# Altium PCB ETRX_RECU.PcbDoc
Units mm, origin at the board's own origin, x right, y up, seen from the top; angles counter-clockwise.
Board outline 155 x 55 mm, 4 copper layers (Top Layer, GND, PWR, Bottom Layer), stack 1.506 mm thick; 75 components, 59 nets, 293 pads, 278 vias.
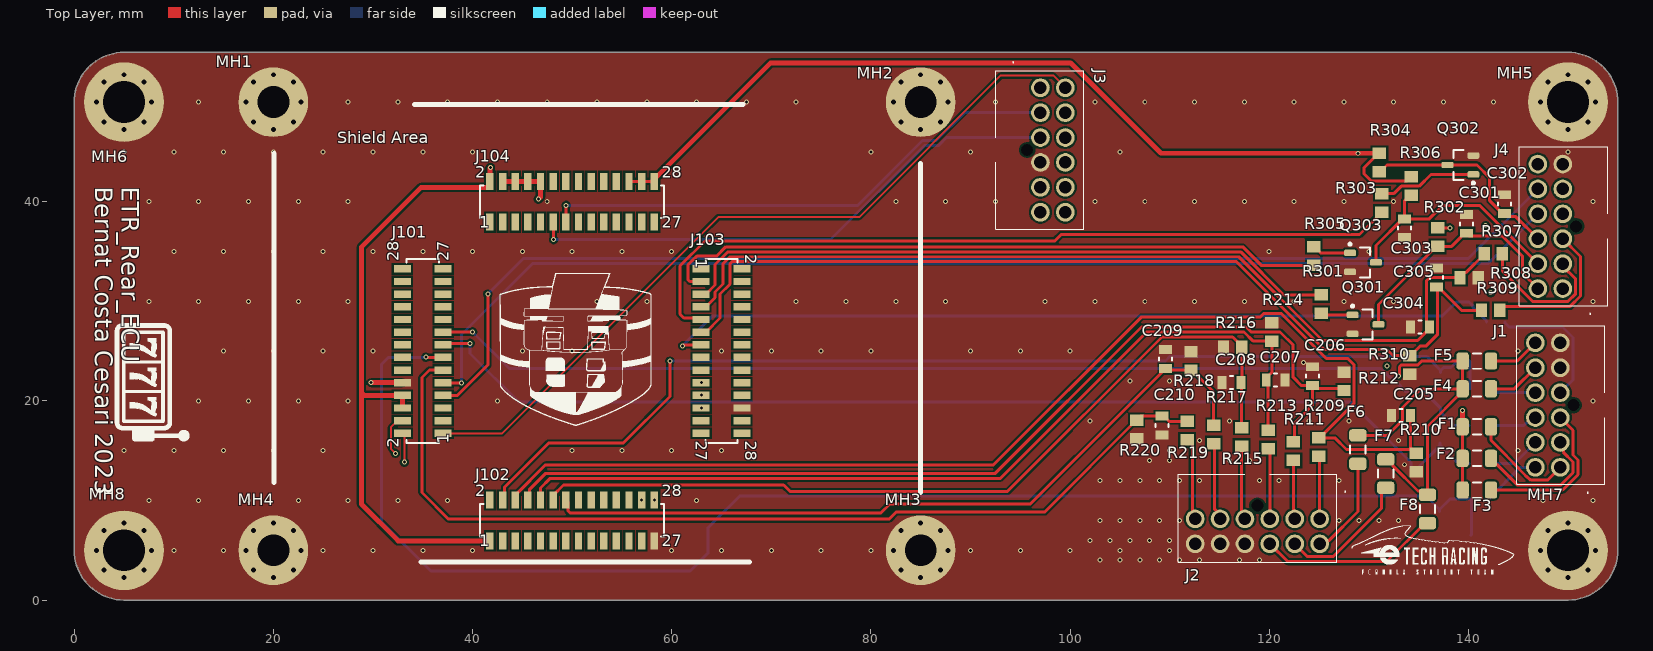
[diagram p0: Top Layer view]
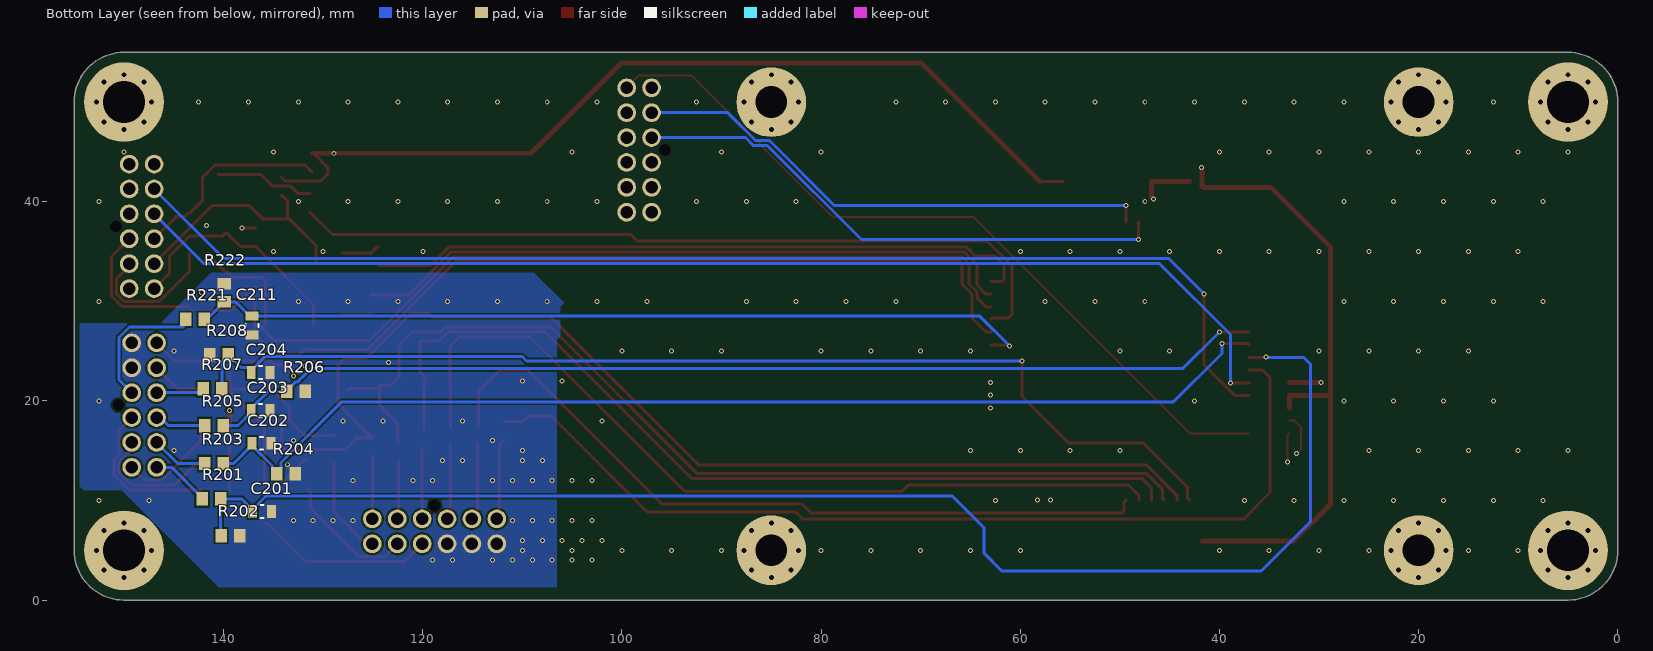
[diagram p1: Bottom Layer view, seen from below]
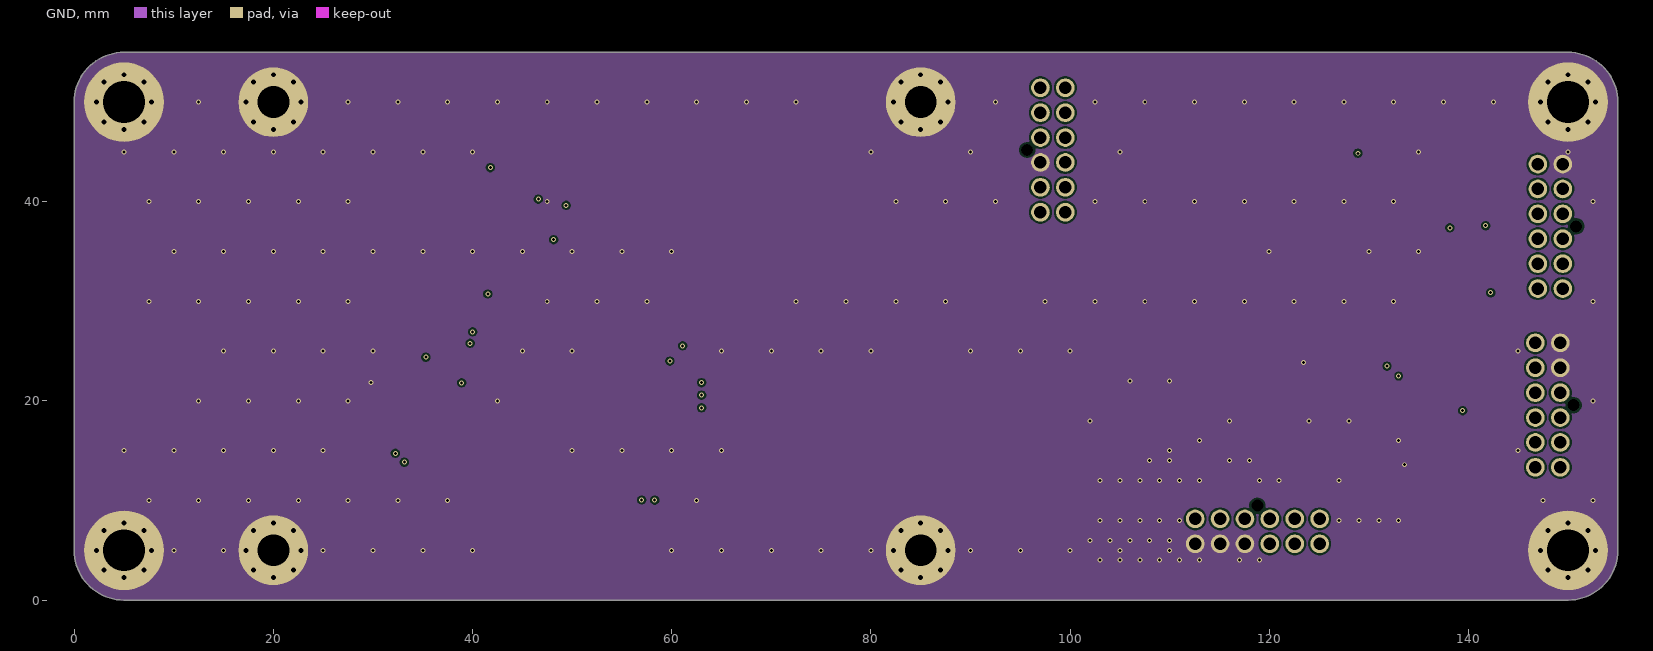
[diagram p2: GND]
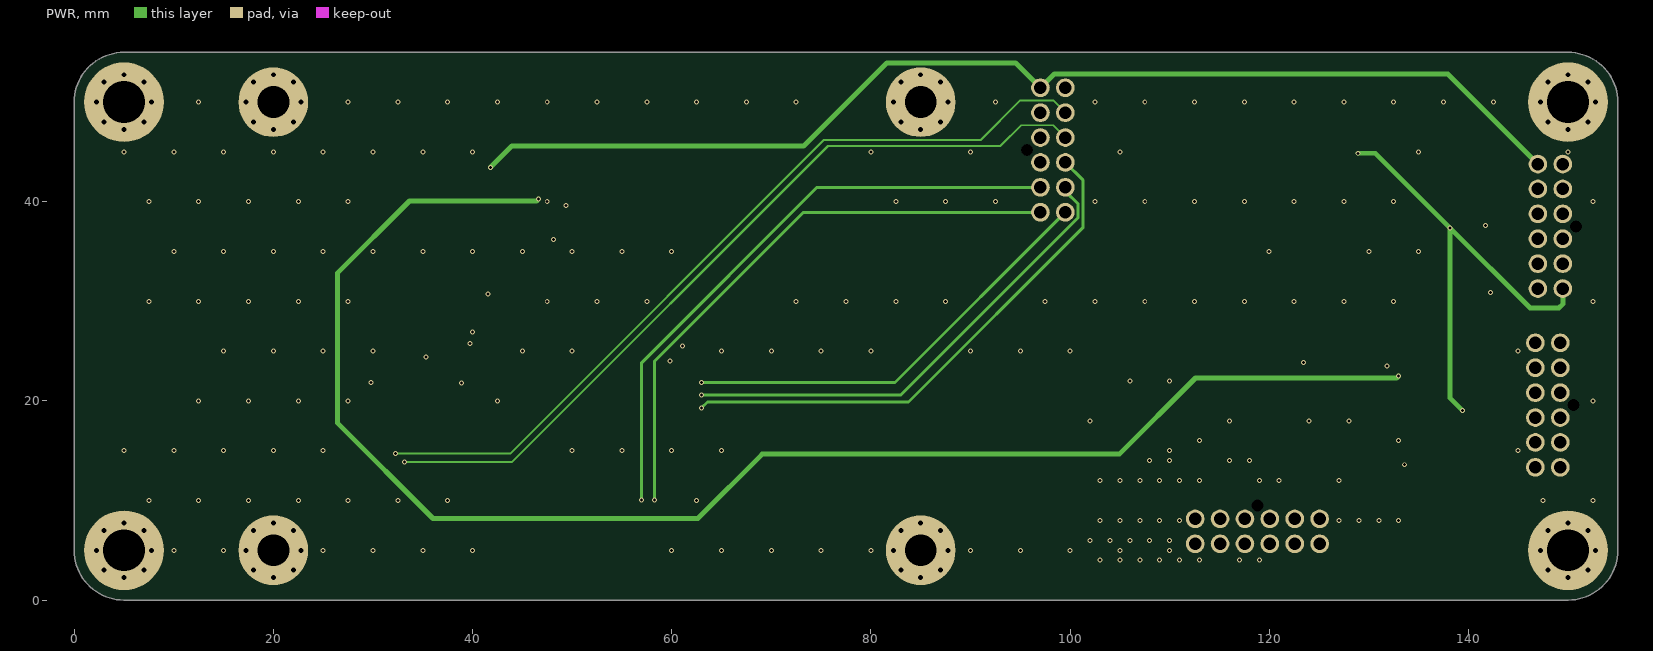
[diagram p3: PWR]
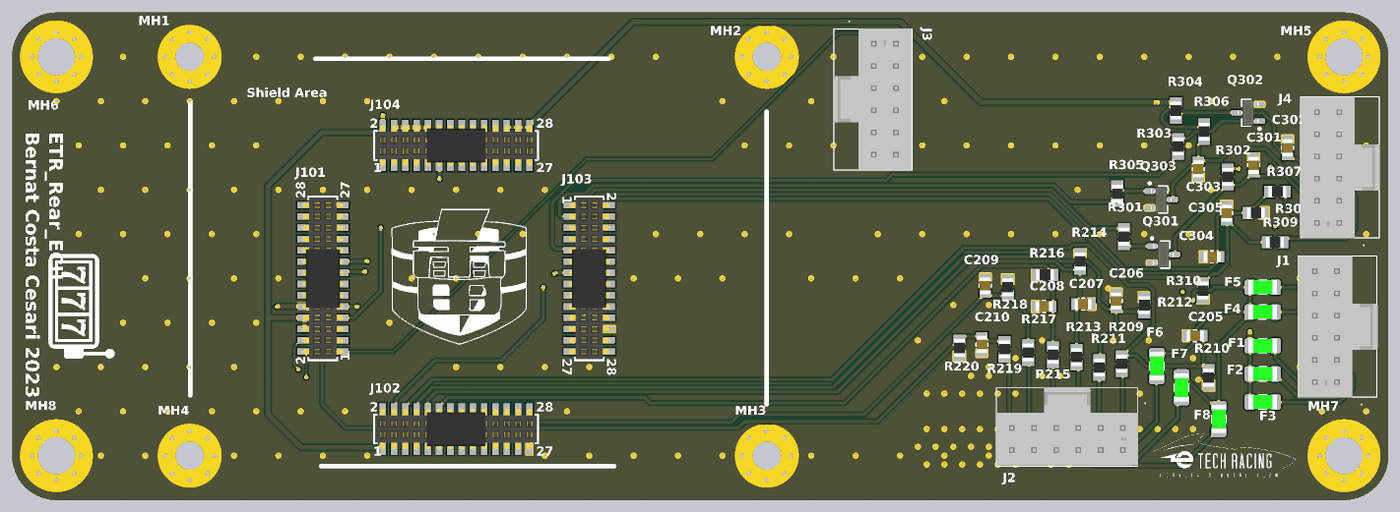
[diagram p4: 3D render of the assembled board from above, using the file's embedded part models]
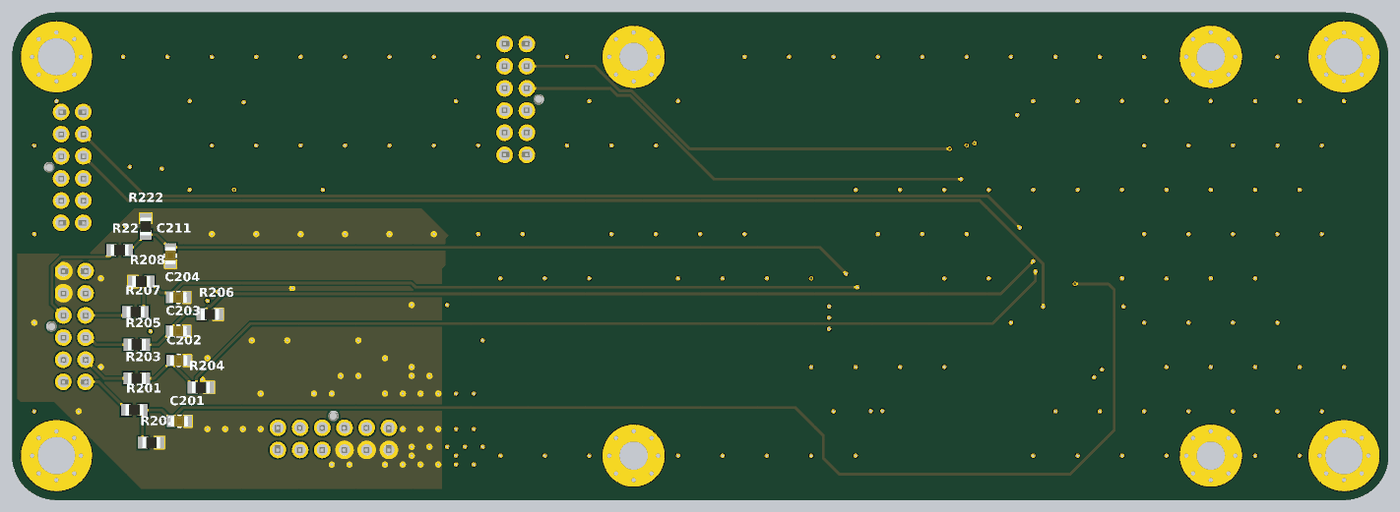
[diagram p5: 3D render of the assembled board from below, using the file's embedded part models]

## Layer stack, top to bottom
Top Solder: solder mask 0.01, Solder Resist, Dk 3.5
Top Layer: signal copper 0.035
Dielectric 2: prepreg 0.1, PP-006, Dk 4.1
GND: signal copper 0.018
Dielectric 4: prepreg 0.1, PP-006, Dk 4.1
Dielectric 1: dielectric 1, FR-4, Dk 4.8
Dielectric 5: prepreg 0.1, PP-006, Dk 4.1
PWR: signal copper 0.018
Dielectric 3: prepreg 0.1, PP-006, Dk 4.1
Bottom Layer: signal copper 0.035
Bottom Solder: solder mask 0.01, Solder Resist, Dk 3.5

## Board outline
5,0 cw(c5,5) 0,5 0,50 cw(c5,50) 5,55 150,55 cw(c150,50) 155,50 155,5 cw(c150,5) 150,0

## Design rules (kind name [scope] priority, off if disabled: settings)
Clearance [All] p1: gap=0.2 ignorepadtopadclearanceinfootprint=FALSE
HoleSize [All] p1: absolutevalues=TRUE maxlimit=2.54 minlimit=0.3 maxpercent=80.000 minpercent=20.000
PlaneClearance [All] p1: clearance=0.5
PlaneConnect [All] p1: planeconnectstyle=Direct reliefexpansion=0.508 reliefentries=4 reliefconductorwidth=0.254 reliefairgap=0.254
PolygonConnect [All] p1: connectstyle=Direct reliefconductorwidth=0.254 reliefentries=4 polygonreliefangle="90 Angle" airgapwidth=0.254
RoutingVias [All] p1: holewidth=0.3 width=0.5 viastyle="Through Hole" minholewidth=0.2 minwidth=0.3 maxholewidth=0.5 maxwidth=0.7
SolderMaskExpansion [All] p1: expansion=0.102 istentingtop=FALSE
Width [All] p1: maxlimit=1 minlimit=0.2 preferedwidth=0.3 minimp=50.000000 maximp=50.000000 favimp=50.000000
27 further rules are at their usual default settings.

## Classes and differential pairs
component class ETRX_RECU: F1 F2 F3 F4 F5 F6 F7 F8 J1 J2 J3 J4 MH1 MH2 MH3 MH4 MH5 MH6 MH7 MH8
component class [3]Power: C301 C302 C303 C304 C305 Q301 Q302 Q303 R301 R302 R303 R304 R305 R306 R307 R308 R309 R310
component class [2]Sensors: C201 C202 C203 C204 C205 C206 C207 C208 C209 C210 C211 R201 R202 R203 R204 R205 R206 R207 R208 R209 R210 R211 R212 R213 R214 R215 R216 R217 R218 R219 R220 R221 R222
component class [1]Shield: J101 J102 J103 J104

## Components (designator, comment, footprint, x,y, rotation, side; value= is the part's Value field where it differs from the comment)
C201 "885012207103" C0805FNPC-R 136.144,8.89 r180 bottom
C202 "885012207103" C0805FNPC-R 136.21,15.748 r180 bottom
C203 "885012207103" C0805FNPC-R 136.271,19.05 r180 bottom
C204 "885012207103" C0805FNPC-R 136.271,22.86 r180 bottom
C205 "885012207098" C0805FNPC-R 133.223,18.542 r180 top
C206 "885012207098" C0805FNPC-R 124.333,22.479 r90 top
C207 "885012207098" C0805FNPC-R 120.65,22.098 r0 top
C208 "885012207098" C0805FNPC-R 116.205,21.844 r180 top
C209 "885012207098" C0805FNPC-R 109.601,24.196 r90 top
C210 "885012207098" C0805FNPC-R 109.22,17.526 r270 top
C211 "885012207103" C0805FNPC-R 137.16,27.559 r270 bottom
C301 "885012207103" C0805FNPC-R 139.827,37.785 r90 top
C302 "885012207103" C0805FNPC-R 143.637,39.751 r90 top
C303 "885012207103" C0805FNPC-R 133.604,37.338 r270 top
C304 "885012207103" C0805FNPC-R 135.128,27.432 r180 top
C305 "885012207103" C0805FNPC-R 136.779,32.385 r90 top
F1 "0437001.WRA" Fuse_1206 140.843,17.399 r0 top
F2 "0437001.WRA" Fuse_1206 140.843,14.224 r0 top
F3 "0437001.WRA" Fuse_1206 140.843,11.049 r0 top
F4 "0437001.WRA" Fuse_1206 140.843,21.209 r180 top
F5 "0437001.WRA" Fuse_1206 140.843,24.003 r180 top
F6 "0437001.WRA" Fuse_1206 128.905,15.113 r90 top
F7 "0437001.WRA" Fuse_1206 131.699,12.7 r90 top
F8 "0437001.WRA" Fuse_1206 135.89,9.144 r90 top
J1 "1053101112" J_NanoFit_2x6_V 149.225,13.328 r270 top
J2 "1053101112" J_NanoFit_2x6_V 125.062,8.15 r0 top
J3 "1053101112" J_NanoFit_2x6_V 97.028,51.442 r90 top
J4 "1053101112" J_NanoFit_2x6_V 149.479,31.282 r270 top
J101 "62332821021" 62332821021 35,25 r90 top
J102 "62332821021" 62332821021 50,8 r0 top
J103 "62332821021" 62332821021 65,25 r270 top
J104 "62332821021" 62332821021 50,40 r0 top
MH1 "Mounting_Hole_M3" Mounting_Hole_M3 20,50 r0 top
MH2 "Mounting_Hole_M3" Mounting_Hole_M3 85,50 r0 top
MH3 "Mounting_Hole_M3" Mounting_Hole_M3 85,5 r0 top
MH4 "Mounting_Hole_M3" Mounting_Hole_M3 20,5 r0 top
MH5 "Mounting_Hole_M4" Mounting_Hole_M4 150,50 r0 top
MH6 "Mounting_Hole_M4" Mounting_Hole_M4 5,50 r0 top
MH7 "Mounting_Hole_M4" Mounting_Hole_M4 150,5 r0 top
MH8 "Mounting_Hole_M4" Mounting_Hole_M4 5,5 r0 top
Q301 "BC817-25LT1G" TRT-NPN-0.5/45-SOT23 129.667,27.686 r0 top
Q302 "BC817-25LT1G" TRT-NPN-0.5/45-SOT23 139.192,43.688 r180 top
Q303 "BC817-25LT1G" TRT-NPN-0.5/45-SOT23 129.413,33.909 r0 top
R201 "CR0805-JW-102ELF" R0805FTK 141.224,10.16 r0 bottom
R202 "1k96" R0805FTK 139.319,6.477 r0 bottom
R203 "CR0805-JW-102ELF" R0805FTK 140.97,13.716 r0 bottom
R204 "1k96" R0805FTK 133.731,12.7 r0 bottom
R205 "CR0805-JW-102ELF" R0805FTK 140.97,17.526 r0 bottom
R206 "1k96" R0805FTK 132.715,20.955 r0 bottom
R207 "CR0805-JW-102ELF" R0805FTK 141.097,21.209 r0 bottom
R208 "1k96" R0805FTK 140.462,24.638 r180 bottom
R209 "12k5" R0805FTK 124.968,15.367 r90 top
R210 "2k" R0805FTK 134.747,13.807 r270 top
R211 "12k5" R0805FTK 122.428,14.95 r90 top
R212 "2k" R0805FTK 127.508,21.971 r90 top
R213 "12k5" R0805FTK 119.888,16.129 r90 top
R214 "2k" R0805FTK 120.269,26.924 r90 top
R215 "12k5" R0805FTK 117.221,16.383 r90 top
R216 "2k" R0805FTK 116.332,25.4 r180 top
R217 "12k5" R0805FTK 114.427,16.637 r90 top
R218 "2k" R0805FTK 112.141,24.003 r90 top
R219 "12k5" R0805FTK 111.76,17.018 r90 top
R220 "2k" R0805FTK 106.68,17.145 r270 top
R221 "CR0805-JW-102ELF" R0805FTK 142.875,28.194 r0 bottom
R222 "1k96" R0805FTK 139.954,30.861 r270 bottom
R301 "CR0805-JW-102ELF" R0805FTK 125.222,29.718 r270 top
R302 "CR0805-JW-103ELF" R0805FTK 136.906,36.449 r270 top
R303 "CR0805-JW-102ELF" R0805FTK 131.318,39.878 r90 top
R304 "CR0805-JW-103ELF" R0805FTK 131.064,43.942 r270 top
R305 "CR0805-JW-102ELF" R0805FTK 124.46,34.544 r90 top
R306 "CR0805-JW-103ELF" R0805FTK 134.239,41.565 r270 top
R307 "CR0805-JW-102ELF" R0805FTK 142.494,34.798 r0 top
R308 "1k96" R0805FTK 140.081,32.385 r180 top
R309 "CR0805-JW-102ELF" R0805FTK 142.24,29.083 r0 top
R310 "1k96" R0805FTK 134.112,23.622 r90 top

## Footprints (in the part's own frame and the unit in brackets; to place one, negate y for a bottom-side part, rotate by r counter-clockwise, add the part's x,y. Pads: shape width x height; smd on the part's side, far side on the other; paste and mask are expansions set on the pad)
62332821021 [mm] "Socket Header, Pitch 1.27 mm, SMT, Vertical, dual row, 28p"
  rect 0.74x1.7 smd: 1(-8.255,-2.05) 2(-8.255,2.05) 3(-6.985,-2.05) 4(-6.985,2.05) 5(-5.715,-2.05) 6(-5.715,2.05) 7(-4.445,-2.05) 8(-4.445,2.05) 9(-3.175,-2.05) 10(-3.175,2.05) 11(-1.905,-2.05) 12(-1.905,2.05) 13(-0.635,-2.05) 14(-0.635,2.05) 15(0.635,-2.05) 16(0.635,2.05) 17(1.905,-2.05) 18(1.905,2.05) 19(3.175,-2.05) 20(3.175,2.05) 21(4.445,-2.05) 22(4.445,2.05) 23(5.715,-2.05) 24(5.715,2.05) 25(6.985,-2.05) 26(6.985,2.05) 27(8.255,-2.05) 28(8.255,2.05)
  silkscreen extent -9.24,-1.62 9.24,1.63, body extent -9.09,-2.3 9.09,2.3, height 4.69
C0805FNPC-R [mm]
  rect 0.9x1.3 smd: 1(-0.95,0) 2(0.95,0)
  silkscreen extent -0.15,-0.65 0.15,0.65, body extent -1.03,-0.63 0.97,0.63, height 0.96
Fuse_1206 [mm] "Chip Resistor, 2-Leads, Body 3,20x1,58mm, IPC Medium Density"
  rrect50% 1.25x1.75 smd: 1(-1.425,0) 2(1.425,0)
  silkscreen extent -0.4,-0.77 0.4,0.77, body extent -1.6,-0.79 1.6,0.79, height 0.86
J_NanoFit_2x6_V [mm]
  round 1.875 hole 1.25: 1(0,0) 2(-2.5,0) 3(-5,0) 4(-7.5,0) 5(-10,0) 6(-12.5,0) 7(0,-2.5) 8(-2.5,-2.5) 9(-5,-2.5) 10(-7.5,-2.5) 11(-10,-2.5) 12(-12.5,-2.5)
  round 0.675 hole 1.2 unplated: MH1(-6.25,1.34)
  silkscreen extent -14.22,-4.35 2.6,4.49, body extent -14.19,-4.26 1.75,4.58, height 10.68
Mounting_Hole_M3 [mm]
  round 7 hole 3.2: 1(0,0)
Mounting_Hole_M4 [mm]
  round 8 hole 4.2: 1(0,0)
R0805FTK [mm] "Chip Resistor, 2-Leads, Body 2,00x1,25mm, IPC Medium Density"
  rect 1.15x1.35 smd: 1(-0.925,0) 2(0.925,0)
  body extent -1,-0.63 1,0.63, height 0.65
TRT-NPN-0.5/45-SOT23 [mm] "SOT23, 3-Leads, Body 2,92x2,37mm, Pitch 0,95mm, IPC Low Density"
  rrect50% 1.2x0.65 smd: B(-1.3,0.95) C(1.3,0) E(-1.3,-0.95)
  silkscreen extent -1.42,-1.5 0.7,1.95, body extent -1.18,-1.46 1.19,1.46, height 1.12

## Part data
C201 C202 C203 C204 C211 C301 C302 C303 C304 C305: library part C1u-50V-0805FNPC-X7R, "Multilayer Ceramic Capacitor, Wcap-Csgp Series, 1 F, 10%, X7R, 50 V, 0805 [2012 Metric] Rohs Compliant: Yes", Capacitance=1uF, Case Code (Imperial)=0805, Case Code (Metric)=2012, Dielectric=X7R, Manufacturer 1="Wurth Electronics", Max Operating Temperature=85°C, Min Operating Temperature=-55°C, Supplier Part Number 1=1813523, Tolerance=10%, Voltage Rating=50V, .Creator=GP, Case/Package=0805, Category="Ceramic Capacitors", ComponentLink1Description=http://www.farnell.com/datasheets/1958501.pdf?src-supplier=Farnell, ComponentLink1URL=http://www.farnell.com/datasheets/1958501.pdf?src-supplier=Farnell, ComponentLink2Description=http://www.farnell.com/datasheets/1958501.pdf?src-supplier=Element14, ComponentLink2URL=http://www.farnell.com/datasheets/1958501.pdf?src-supplier=Element14, ComponentLink3Description=https://katalog.we-online.de/pbs/datasheet/885012107003.pdf?src-supplier=Digi-Key, ComponentLink3URL=https://katalog.we-online.de/pbs/datasheet/885012107003.pdf?src-supplier=Digi-Key, ComponentLink4Description=http://www.farnell.com/datasheets/1958501.pdf?src-supplier=Newark, ComponentLink4URL=http://www.farnell.com/datasheets/1958501.pdf?src-supplier=Newark, Length=0.079inch, Manufacturer Part Number 1=885012207103, Mount="Surface Mount", Packaging="Cut Tape", Pricing 1="50=0,27200, 250=0,25300, 500=0,22800, 1250=0,20100, 2500=0,17100 (GBP)", REACH SVHC=Unknown, RoHS=Yes, RoHS Compliant=Yes, Stock 1=5100, Supplier 1=RSComponents, Thickness=0.053inch, Voltage Rating (DC)=50V, Width=0.049inch
C205 C206 C207 C208 C209 C210: library part C100n-50V-0805FNPC-X7R, "Cap, 0.1ΜF, 50V, 10%, X7R, 0805", Capacitance=100nF, Case Code (Imperial)=0805, Case Code (Metric)=2012, Dielectric=X7R, Manufacturer 1="Wurth Electronics", Max Operating Temperature=125°C, Min Operating Temperature=-55°C, Supplier Part Number 1=1813493, Tolerance=10%, Voltage Rating=50V, .Creator=DR, Case/Package=0805, Category="Ceramic Capacitors", ComponentLink1Description=http://www.farnell.com/datasheets/1958498.pdf?src-supplier=Farnell, ComponentLink1URL=http://www.farnell.com/datasheets/1958498.pdf?src-supplier=Farnell, ComponentLink2Description=http://www.farnell.com/datasheets/1958498.pdf?src-supplier=Element14, ComponentLink2URL=http://www.farnell.com/datasheets/1958498.pdf?src-supplier=Element14, ComponentLink3Description=https://katalog.we-online.de/pbs/datasheet/885012207098.pdf?src-supplier=Digi-Key, ComponentLink3URL=https://katalog.we-online.de/pbs/datasheet/885012207098.pdf?src-supplier=Digi-Key, ComponentLink4Description=http://www.farnell.com/datasheets/1958498.pdf?src-supplier=Newark, ComponentLink4URL=http://www.farnell.com/datasheets/1958498.pdf?src-supplier=Newark, Length=0.079inch, Manufacturer Part Number 1=885012207098, Mount="Surface Mount", Packaging="Cut Tape", Pricing 1="100=0,10200, 500=0,07100, 2000=0,06100 (GBP)", REACH SVHC=Unknown, RoHS=Yes, RoHS Compliant=Yes, Stock 1=8000, Supplier 1=RSComponents, Thickness=0.035inch, Voltage Rating (DC)=50V, Width=0.049inch
F1 F2 F3 F4 F5 F6 F7 F8: library part Fuse_1A_63V_1206, "Fuse Chip Fast Acting 1A 63V SMD Solder Pad 1206 Ceramic T/R Automotive", Case Code (Imperial)=1206, Case Code (Metric)=3216, Current Rating=1A, Manufacturer=Littelfuse, Max Operating Temperature=150°C, Min Operating Temperature=-55°C, Supplier Part Number 1=F10001CT-ND, Voltage Rating (AC)=63V, .Creator=DO, Approvals=CSA,cURus, Case/Package=1206, Category=Fuses, ComponentLink1Description=https://www.littelfuse.com/~/media/electronics/datasheets/fuses/littelfuse_fuse_437a_datasheet.pdf.pdf?src-supplier=Digi-Key, ComponentLink1URL=https://www.littelfuse.com/~/media/electronics/datasheets/fuses/littelfuse_fuse_437a_datasheet.pdf.pdf?src-supplier=Digi-Key, ComponentLink2Description="Where buy it", ComponentLink2URL=https://www.mouser.es/ProductDetail/Littelfuse/0437001WRA?qs=DXv0QSHKF4z9CJhPXjxR%252BA%3D%3D, Fuse Type="Board Mount (Cartridge Style Excluded)", Manufacturer Part Number=0437001.WRA, Mount="Surface Mount", Packaging="Tape and Reel", Pricing 1="1=1,52000, 5=1,47000, 10=1,37600, 50=1,13860, 100=0,94880, 250=0,92508, 500=0,78276, 1000=0,68788 (USD)", RoHS=Yes, Stock 1=5820, Supplier 1=Digi-Key, Voltage Rating (DC)=63V
J1 J2 J3 J4: library part J_NanoFit_2x6_V, "Nano-Fit Vertical Header, Through Hole, 2.50mm Pitch, Dual Row, 12 Circuits, with Kinked Pins, Tin (Sn) Plating, Black, Glow-Wire Capable, Tray"
J101 J102 J103 J104: "WR-PHD Socket Header, SMT, Vertical, pitch 1.27mm, 2 Row, 28P", Contact Resistance=20mΩ, Manufacturer="Wurth Elektronik", Operating Temperature Max=105°C, Operating Temperature Min=-40°C, Rated Current=1A, Withstanding Voltage=500V, Working Voltage=250V, Category="Board-to-Board Connectors", ComponentLink1Description="Website Link", ComponentLink1URL=https://www.we-online.com/redexpert/article/62332821021?ad, ComponentLink2Description="Datasheet Link", ComponentLink2URL=https://www.we-online.com/redexpert/spec/62332821021?ad, Gender="Socket Header", Manufacturer Part Number=62332821021, Match Code=WR-PHD, Mount="Surface Mount", Number of Pins=28, Number of Rows=2, Orientation=Vertical, Packaging="Tape and Reel", Pitch=1.27mm
Q301 Q302 Q303: library part TRT-NPN-0.5/45-SOT23, "ON Semi BC817-25LT1G NPN Bipolar Transistor; 0.5 A; 45 V; 3-Pin SOT-23", Case/Package=SOT-23-3, Collector Base Voltage (VCBO)=50V, Collector Emitter Breakdown Voltage=45V, Collector Emitter Saturation Voltage=700mV, Current Rating=500mA, Emitter Base Voltage (VEBO)=5V, Frequency=100MHz, Package Quantity=1, Power Dissipation=300mW, Supplier Part Number 1=BC817-25LT1GOSCT-ND, .Creator=GP, Category=Transistor, Collector Emitter Voltage (VCEO)=45V, Collector-emitter Voltage-Max=700mV, ComponentLink1Description=Datasheet, ComponentLink2Description="Where buy it", ComponentLink3Description=https://datasheet.ciiva.com/27748/2010413-27748829.pdf?src-supplier=Jameco, ComponentLink3URL=https://datasheet.ciiva.com/27748/2010413-27748829.pdf?src-supplier=Jameco, ComponentLink4Description=https://datasheet.ciiva.com/15138/getdatasheetpartid-38405-15138602.pdf?src-supplier=Verical, ComponentLink4URL=https://datasheet.ciiva.com/15138/getdatasheetpartid-38405-15138602.pdf?src-supplier=Verical, ComponentLink5Description=https://datasheet.ciiva.com/1196/bc817-16lt1-d-1196558.pdf?src-supplier=Element14, ComponentLink5URL=https://datasheet.ciiva.com/1196/bc817-16lt1-d-1196558.pdf?src-supplier=Element14, ComponentLink6Description=https://datasheet.ciiva.com/22641/bc817-16lt1-d-22641013.pdf?src-supplier=Farnell, ComponentLink6URL=https://datasheet.ciiva.com/22641/bc817-16lt1-d-22641013.pdf?src-supplier=Farnell, ComponentLink7Description=https://datasheet.ciiva.com/22664/bc817-16lt1-d-22664204.pdf?src-supplier=Element14, ComponentLink7URL=https://datasheet.ciiva.com/22664/bc817-16lt1-d-22664204.pdf?src-supplier=Element14, ComponentLink8Description=https://datasheet.ciiva.com/22664/1842041-22664101.pdf?src-supplier=Element14, ComponentLink8URL=https://datasheet.ciiva.com/22664/1842041-22664101.pdf?src-supplier=Element14, ComponentLink9Description=https://datasheet.ciiva.com/4722/bc817-16lt1-d-104560-4722229.pdf?src-supplier=Mouser, ComponentLink9URL=https://datasheet.ciiva.com/4722/bc817-16lt1-d-104560-4722229.pdf?src-supplier=Mouser, ComponentLink10Description=https://datasheet.ciiva.com/1195/bc817-16lt1-d-1195763.pdf?src-supplier=Element14, ComponentLink10URL=https://datasheet.ciiva.com/1195/bc817-16lt1-d-1195763.pdf?src-supplier=Element14, ComponentLink11Description=https://datasheet.ciiva.com/1195/bc817-16lt1-d-1195764.pdf?src-supplier=Element14, ComponentLink11URL=https://datasheet.ciiva.com/1195/bc817-16lt1-d-1195764.pdf?src-supplier=Element14, ComponentLink12Description=https://datasheet.ciiva.com/11197/bc817-16lt1-d-11197514.pdf?src-supplier=Avnet, ComponentLink12URL=https://datasheet.ciiva.com/11197/bc817-16lt1-d-11197514.pdf?src-supplier=Avnet, ComponentLink13Description=https://datasheet.ciiva.com/25996/bc817-16lt1-d-25996327.pdf?src-supplier=Avnet+Europe, ComponentLink13URL=https://datasheet.ciiva.com/25996/bc817-16lt1-d-25996327.pdf?src-supplier=Avnet+Europe, ComponentLink14Description=https://datasheet.ciiva.com/976/bc817-16lt1-d-976357.pdf?src-supplier=Digi-Key, ComponentLink14URL=https://datasheet.ciiva.com/976/bc817-16lt1-d-976357.pdf?src-supplier=Digi-Key, ComponentLink15Description=https://datasheet.ciiva.com/976/bc817-16lt1-d-976358.pdf?src-supplier=Digi-Key, ComponentLink15URL=https://datasheet.ciiva.com/976/bc817-16lt1-d-976358.pdf?src-supplier=Digi-Key, ComponentLink16Description=https://datasheet.ciiva.com/976/bc817-16lt1-d-976356.pdf?src-supplier=Digi-Key, ComponentLink16URL=https://datasheet.ciiva.com/976/bc817-16lt1-d-976356.pdf?src-supplier=Digi-Key, Contact Plating=Tin,Matte, Element Configuration=Single, Gain Bandwidth Product=100MHz, Halogen Free="Halogen Free", Height=0.94mm, hFE Min=160, Lead Free="Lead Free", Length=2.9mm, Max Breakdown Voltage=45V, Max Collector Current=500mA, Max Frequency=100MHz, Number of Elements=1, Number of Pins=3, Pricing 1="1=0,20000, 10=0,18500, 100=0,10080, 500=0,06204, 1000=0,04229 (USD)", Radiation Hardening=No, REACH SVHC="No SVHC", RoHS Compliant=Yes, Series=-, Supplier 1=Digi-Key, Transition Frequency=100MHz, Width=1.3mm
R201 R203 R205 R207 R221 R301 R303 R305 R307 R309: library part R1k-0805FTK, "Res Thick Film 0805 1K Ohm 5% 1/8W ±200ppm/°C Molded SMD SMD Paper Tape on Plastic Reel", Case Code (Imperial)=0805, Case Code (Metric)=2012, Manufacturer 1=Bourns, Max Operating Temperature=155°C, Max Power Dissipation=125mW, Min Operating Temperature=-55°C, Package Quantity=1, Resistance=1kR, Resistor Type="Thick Film", Temperature Coefficient=200ppm/°C, Tolerance=5%, Voltage Rating=150V, .Creator=GP, Case/Package=0805, Category="Chip SMD Resistors", ComponentLink1Description=https://datasheet.ciiva.com/11821/0900766b80fcdb72-11821134.pdf?src-supplier=RSComponents, ComponentLink1URL=https://datasheet.ciiva.com/11821/0900766b80fcdb72-11821134.pdf?src-supplier=RSComponents, ComponentLink2Description=https://datasheet.ciiva.com/15225/getdatasheetpartid-78155-15225381.pdf?src-supplier=Verical, ComponentLink2URL=https://datasheet.ciiva.com/15225/getdatasheetpartid-78155-15225381.pdf?src-supplier=Verical, ComponentLink3Description=https://datasheet.ciiva.com/22693/1902866-22693253.pdf?src-supplier=Element14, ComponentLink3URL=https://datasheet.ciiva.com/22693/1902866-22693253.pdf?src-supplier=Element14, ComponentLink4Description=https://datasheet.ciiva.com/7986/1856384-7986184.pdf?src-supplier=Element14, ComponentLink4URL=https://datasheet.ciiva.com/7986/1856384-7986184.pdf?src-supplier=Element14, ComponentLink5Description=https://datasheet.ciiva.com/7985/1856384-7985867.pdf?src-supplier=Element14, ComponentLink5URL=https://datasheet.ciiva.com/7985/1856384-7985867.pdf?src-supplier=Element14, ComponentLink6Description=https://datasheet.ciiva.com/30242/159chpreztr-30242765.pdf?src-supplier=Onlinecomponents.com, ComponentLink6URL=https://datasheet.ciiva.com/30242/159chpreztr-30242765.pdf?src-supplier=Onlinecomponents.com, ComponentLink7Description=https://datasheet.ciiva.com/6547/chpreztr-6547359.pdf?src-supplier=Digi-Key, ComponentLink7URL=https://datasheet.ciiva.com/6547/chpreztr-6547359.pdf?src-supplier=Digi-Key, Contact Plating=Tin, Depth=1.25mm, Features="Moisture Resistant", Height=0.5mm, Lead Free="Lead Free", Length=2mm, Manufacturer Part Number 1=CR0805-JW-102ELF, Military Standard=Not, Mount="Surface Mount", Number of Pins=2, Number of Terminations=2, Packaging="Tape and Reel", Power Rating=125mW, Pricing 1="1=0,05930, 10=0,03510, 25=0,01790, 100=0,00800, 250=0,00790, 500=0,00590, 1000=0,00360, 3000=0,00350, 6000=0,00250 (USD)", Radiation Hardening=No, REACH SVHC="No SVHC", RoHS=Yes, Stock 1=27510, Supplier 1="Arrow Electronics", Supplier Part Number 1=CR0805-JW-102ELF, Termination=SMD/SMT, Thickness=508um, Voltage Rating (DC)=150V, Width=1.25mm
R202 R204 R206 R208 R222 R308 R310: library part R1k96-0805FTK
R209 R211 R213 R215 R217 R219: library part R12k5-0805FTK
R210 R212 R214 R216 R218 R220: library part R2k-0805FTK
R302 R304 R306: library part R10k-0805FTK, "BOURNS         CR0805-JW-103ELF            Surface Mount Chip Resistor, Thick Film, CR Series, 10 kohm, 125 mW,  5%, 150 V", Case Code (Imperial)=0805, Case Code (Metric)=2012, Manufacturer 1=Bourns, Max Operating Temperature=155°C, Max Power Dissipation=125mW, Min Operating Temperature=-55°C, Package Quantity=1, Resistance=10kR, Resistance Tolerance=5%, Resistor Type="Thick Film", Temperature Coefficient=200ppm/°C, Voltage Rating=150V, Voltage Rating (DC)=100V, .Creator=DR, Case/Package=0805, Category="Chip SMD Resistors", ComponentLink1Description=https://datasheet.ciiva.com/11821/0900766b80fcdb72-11821135.pdf?src-supplier=RSComponents, ComponentLink1URL=https://datasheet.ciiva.com/11821/0900766b80fcdb72-11821135.pdf?src-supplier=RSComponents, ComponentLink2Description=https://datasheet.ciiva.com/9122/chpreztr-9122374.pdf?src-supplier=Avnet, ComponentLink2URL=https://datasheet.ciiva.com/9122/chpreztr-9122374.pdf?src-supplier=Avnet, ComponentLink3Description=https://datasheet.ciiva.com/22693/1902866-22693254.pdf?src-supplier=Element14, ComponentLink3URL=https://datasheet.ciiva.com/22693/1902866-22693254.pdf?src-supplier=Element14, ComponentLink4Description=https://datasheet.ciiva.com/7986/691949-7986187.pdf?src-supplier=Element14, ComponentLink4URL=https://datasheet.ciiva.com/7986/691949-7986187.pdf?src-supplier=Element14, ComponentLink5Description=https://datasheet.ciiva.com/30065/159chpreztr-30065976.pdf?src-supplier=Onlinecomponents.com, ComponentLink5URL=https://datasheet.ciiva.com/30065/159chpreztr-30065976.pdf?src-supplier=Onlinecomponents.com, ComponentLink6Description=https://datasheet.ciiva.com/16783/70154685-16783482.pdf?src-supplier=Allied+Electronics, ComponentLink6URL=https://datasheet.ciiva.com/16783/70154685-16783482.pdf?src-supplier=Allied+Electronics, ComponentLink7Description=https://datasheet.ciiva.com/5548/chpreztr-5548491.pdf?src-supplier=Mouser, ComponentLink7URL=https://datasheet.ciiva.com/5548/chpreztr-5548491.pdf?src-supplier=Mouser, ComponentLink8Description=https://datasheet.ciiva.com/6559/chpreztr-6559900.pdf?src-supplier=Digi-Key, ComponentLink8URL=https://datasheet.ciiva.com/6559/chpreztr-6559900.pdf?src-supplier=Digi-Key, ComponentLink9Description=https://datasheet.ciiva.com/6559/chpreztr-6559901.pdf?src-supplier=Digi-Key, ComponentLink9URL=https://datasheet.ciiva.com/6559/chpreztr-6559901.pdf?src-supplier=Digi-Key, ComponentLink10Description=https://datasheet.ciiva.com/7985/1856384-7985869.pdf?src-supplier=Element14, ComponentLink10URL=https://datasheet.ciiva.com/7985/1856384-7985869.pdf?src-supplier=Element14, ComponentLink11Description=https://datasheet.ciiva.com/48692/001055517-da-01-en-smd-wid-cr0805-jw-103elf-10k-ohm-1-8w-48692118.pdf?src-supplier=Conrad, ComponentLink11URL=https://datasheet.ciiva.com/48692/001055517-da-01-en-smd-wid-cr0805-jw-103elf-10k-ohm-1-8w-48692118.pdf?src-supplier=Conrad, Construction=Rectangular, Contact Plating=Tin, Depth=1.25mm, Features="Moisture Resistant", Height=0.5mm, Length=2mm, Manufacturer Part Number 1=CR0805-JW-103ELF, Military Standard=Not, Mount="Surface Mount", Number of Pins=2, Number of Terminations=2, Packaging="Tape and Reel", Power Rating=125mW, Pricing 1="1=0,05790, 10=0,01540, 25=0,01340, 100=0,00340 (USD)", Radiation Hardening=No, REACH SVHC="No SVHC", RoHS=Yes, RoHS Compliant=Yes, Series=CR0805, Stock 1=57566, Supplier 1="Arrow Electronics", Supplier Part Number 1=CR0805-JW-103ELF, Technology="THICK FILM", Termination=SMD/SMT, Thickness=508um, Tolerance=5%, Width=1.25mm

## Via types
v1: diameter 0.5, hole 0.3, Top Layer to Bottom Layer, 214 vias
v2: diameter 0.7, hole 0.5, Top Layer to Bottom Layer, 64 vias

## Nets (pads, with @x,y where several pads share a name; then routed paths per layer and width w, separated by ;. In a path a pad name is that pad's centre, name@x,y a point inside that pad or via, vN(x,y) a via of type N, cw(c..) or ccw(c..) an arc to the next point about the centre after c; other vN are vias at no path point)
+5: F1.1 F2.1 F3.1 J4.1 J104.24 J104.26 J104.28 R302.1 R304.1 R306.1 | length 148.8
  Top Layer w0.3: J104.24 J104.26 J104.28@58.039,42.05 ; R304.1@130.964,44.867 129.54,43.443 129.54,42.796 130.244,42.092 133.841,42.092 R306.1 ; R302.1@136.806,37.374 R302.1 v1(138.14,37.374) ; F3.1 F2.1 F1.1
  Top Layer w0.5: J104.28@58.039,42.05 69.939,53.95 100.04,53.95 109.123,44.867 v1(128.905,44.867) 130.964,44.867 R304.1 ; F1.1 v1(139.418,19.022)
  PWR w0.5: v1(128.905,44.867) 130.647,44.867 v1(138.14,37.374) ; v1(139.418,19.022) 138.14,20.3 v1(138.14,37.374) ; J4.1 149.479,29.718 149.098,29.337 146.177,29.337 v1(138.14,37.374)
ACCU_FANS_PWM: J103.5 R301.1 | length 67
  Top Layer w0.3: J103.5 63.43,30.715 64.353,31.638 64.353,33.687 65.641,34.975 117.133,34.975 121.465,30.643 R301.1
ACCU_FANS_RPM: C304.1 J103.7 R307.1 R308.2 | length 92.7
  Top Layer w0.3: J103.7 63.43,29.445 64.353,30.368 64.353,30.93 65.151,31.729 65.151,33.778 65.848,34.475 116.926,34.475 125.34,26.061 134.907,26.061 136.078,27.232 C304.1 135.779,27.731 135.779,32.03 136.134,32.385 R308.2 139.156,32.485 139.581,32.91 139.781,32.91 141.569,34.698 R307.1
AGND: C201.2 C202.2 C203.2 C204.2 C205.2 C206.2 C207.2 C208.2 C209.2 C210.2 C211.2 C301.2 C302.2 C303.2 C304.2 C305.2 J1.5 J1.6 J2.10 J2.11 J2.12 J3.4 J4.6 J101.10 J102.27 J103.24 MH1.1 MH2.1 MH3.1 MH4.1 MH5.1 MH6.1 MH7.1 MH8.1 Q301.E Q302.E Q303.E R202.1 R204.1 R206.1 R208.1 R210.2 R212.2 R214.2 R216.2 R218.2 R220.2 R222.1 R308.1 R310.1 | length 3.1
  Top Layer w0.5: v1(29.826,21.825) J101.10
  other v1: 103,4 105,4 107,4 109,4 111,4 113,4 117,4 119,4 10,5 15,5 25,5 30,5 35,5 40,5 60,5 65,5 70,5 75,5 80,5 90,5 95,5 100,5 105,5 110,5 102,6 104,6 106,6 108,6 110,6 103,8 105,8 107,8 109,8 111,8 127,8 129,8 131,8 133,8 7.5,10 12.5,10 17.5,10 22.5,10 27.5,10 32.5,10 37.5,10 62.5,10 147.5,10 152.5,10 103,12 105,12 107,12 109,12 111,12 113,12 119,12 121,12 127,12 133.604,13.589 108,14 110,14 116,14 118,14 5,15 10,15 15,15 20,15 25,15 50,15 55,15 60,15 65,15 110,15 145,15 113,16 133,16 102,18 116,18 124,18 128,18 12.5,20 17.5,20 22.5,20 27.5,20 42.5,20 152.5,20 106,22 110,22 123.444,23.876 15,25 20,25 25,25 30,25 45,25 50,25 65,25 70,25 75,25 80,25 90,25 95,25 100,25 145,25 7.5,30 12.5,30 17.5,30 22.5,30 27.5,30 47.5,30 52.5,30 57.5,30 72.5,30 77.5,30 82.5,30 87.5,30 97.5,30 102.5,30 107.5,30 112.5,30 117.5,30 122.5,30 127.5,30 132.5,30 152.5,30 10,35 15,35 20,35 25,35 30,35 35,35 40,35 45,35 50,35 55,35 60,35 120,35 130,35 135,35 7.5,40 12.5,40 17.5,40 22.5,40 27.5,40 47.5,40 82.5,40 87.5,40 92.5,40 102.5,40 107.5,40 112.5,40 117.5,40 122.5,40 127.5,40 132.5,40 152.5,40 5,45 10,45 15,45 20,45 25,45 30,45 35,45 40,45 80,45 90,45 105,45 135,45 150,45 12.5,50 27.5,50 32.5,50 37.5,50 42.5,50 47.5,50 52.5,50 57.5,50 62.5,50 67.5,50 72.5,50 92.5,50 102.5,50 107.5,50 112.5,50 117.5,50 122.5,50 127.5,50 132.5,50 137.5,50 142.5,50
  other v2: 5,2.25 20,2.25 85,2.25 150,2.25 3,3 7,3 18,3 22,3 83,3 87,3 148,3 152,3 2.25,5 7.75,5 17.25,5 22.75,5 82.25,5 87.75,5 147.25,5 152.75,5 3,7 7,7 18,7 22,7 83,7 87,7 148,7 152,7 5,7.75 20,7.75 85,7.75 150,7.75 5,47.25 20,47.25 85,47.25 150,47.25 3,48 7,48 18,48 22,48 83,48 87,48 148,48 152,48 2.25,50 7.75,50 17.25,50 22.75,50 82.25,50 87.75,50 147.25,50 152.75,50 3,52 7,52 18,52 22,52 83,52 87,52 148,52 152,52 5,52.75 20,52.75 85,52.75 150,52.75
BL_Control: J4.10 J101.9 | length 119.8
  Top Layer w0.3: J101.9 37.056,21.819 38.891,21.819 v1(38.897,21.813)
  Bottom Layer w0.3: v1(38.897,21.813) 38.897,26.664 46.014,33.782 141.979,33.782 J4.10
BL_LEDs: J4.11 J101.7 | length 122.7
  Top Layer w0.3: J101.7 38.487,20.555 41.529,23.597 v1(41.529,30.734)
  Bottom Layer w0.3: v1(41.529,30.734) 45.085,34.29 139.987,34.29 J4.11
I2C1_SDA: J3.3 J104.11 | length 54.9
  Top Layer w0.3: J104.11 48.114,37.931 48.114,36.214 v1(48.133,36.195)
  Bottom Layer w0.3: v1(48.133,36.195) 75.946,36.195 85.401,45.65 86.802,45.65 87.594,46.442 J3.3
I2C2_SCL: J3.5 J102.26 | length 61.1
  PWR w0.3: v1(56.985,10.05) 56.985,23.838 74.589,41.442 J3.5
I2C2_SDA: J3.6 J102.28 | length 58.9
  PWR w0.3: v1(58.293,10.033) 58.293,24.003 73.232,38.942 J3.6
INPUT_ACCU: J4.2 R307.2 | length 14.3
  Top Layer w0.3: R307.2 143.419,33.021 146.446,29.994 150.012,29.994 150.767,30.749 150.767,32.241 149.479,33.528 J4.2
INPUT_REFRI: J4.3 R309.2 | length 15.2
  Top Layer w0.3: R309.2 143.576,29.495 150.219,29.495 151.266,30.542 151.266,34.495 J4.3
ISC1_SCL: J3.2 J104.13 | length 53.2
  Top Layer w0.3: J104.13 49.384,37.969 49.384,39.605 v1(49.403,39.624)
  Bottom Layer w0.3: v1(49.403,39.624) 78.668,39.624 85.194,46.15 86.595,46.15 89.387,48.942 J3.2
"LV tr": F4.2 F5.2 F6.2 F7.2 F8.2 J104.4 J104.6 J104.8 J104.10 | length 201.8
  Top Layer w0.3: F6.2 131.864,16.538 133.373,18.047 133.373,19.337 135.245,21.209 F4.2 ; F7.2 131.861,14.125 132.406,13.58 132.406,13.478 134.94,10.944 135.515,10.944 F8.2 135.89,17.431 139.418,20.959 F4.2 ; v1(132.987,22.479) 132.987,22.533 133.087,22.633 133.087,23.417 133.292,23.622 134.932,23.622 135.313,24.003 F5.2 F4.2
  Top Layer w0.5: J104.4 J104.6 J104.8 J104.10 46.825,40.475 v1(46.609,40.259)
  PWR w0.5: v1(46.609,40.259) 46.421,40.071 33.662,40.071 26.423,32.832 26.423,17.802 36.03,8.194 62.618,8.194 69.075,14.652 104.949,14.652 112.588,22.291 132.799,22.291 v1(132.987,22.479)
NetF1_2: F1.2 J1.1 | length 10.5
  Top Layer w0.3: F1.2 142.268,16.058 143.243,15.061 145.725,12.517 ccw(c146.725,13.328) 145.911,12.33 145.917,12.325 146.263,12.041 147.937,12.04 J1.1
NetF2_2: F2.2 J1.2 | length 13.5
  Top Layer w0.3: F2.2 142.268,14.062 142.731,13.599 142.893,13.599 144.951,11.541 149.258,11.541 150.513,12.795 150.513,13.861 149.526,14.847 149.526,15.527 J1.2
NetF3_2: F3.2 J1.3 | length 15.9
  Top Layer w0.3: F3.2 144.736,11.049 144.744,11.041 149.465,11.041 151.012,12.588 151.012,14.068 150.513,14.568 150.513,17.04 J1.3
NetF4_1: F4.1 J1.11 | length 5.3
  Top Layer w0.3: F4.1 144.606,21.209 J1.11
NetF5_1: F5.1 J1.12 | length 5.2
  Top Layer w0.3: F5.1 144.9,24.003 J1.12
NetF6_1: F6.1 J2.7 | length 10
  Top Layer w0.3: J2.7 125.363,5.951 125.966,5.951 128.905,8.89 F6.1
NetF7_1: F7.1 J2.8 | length 13.5
  Top Layer w0.3: J2.8 123.85,4.362 126.409,4.362 131.287,9.24 131.287,10.863 F7.1
NetF8_1: F8.1 J2.9 | length 18.2
  Top Layer w0.3: J2.9 121.849,3.862 131.784,3.862 135.64,7.719 F8.1
NetQ301_B: Q301.B R301.2 | length 3.2
  Top Layer w0.3: R301.2 125.379,28.636 Q301.B
NetQ302_B: Q302.B R303.2 | length 10
  Top Layer w0.3: R303.2 132.497,40.803 133.259,41.565 134.021,41.565 135.059,41.565 136.232,42.738 Q302.B
NetQ303_B: Q303.B R305.2 | length 3.9
  Top Layer w0.3: R305.2 124.56,35.469 125.17,34.859 Q303.B
OUTPUT_ACCU: C301.1 J4.7 Q301.C R302.2 | length 24.3
  Top Layer w0.3: Q301.C 130.967,29.685 136.806,35.524 R302.2 138.316,35.524 139.627,36.835 C301.1 140.127,36.535 143.427,36.535 145.408,34.554 145.408,32.853 J4.7
OUTPUT_PUMPS: C303.1 J4.8 Q303.C R306.2 | length 24.7
  Top Layer w0.3: Q303.C 130.713,35.597 133.404,38.288 C303.1 ; R306.2 134.139,40.64 133.604,40.105 C303.1 ; J4.8 141.16,39.601 137.388,39.601 136.075,38.288 C303.1
OUTPUT_REFRI: C302.1 J4.9 Q302.C R304.2 | length 20.6
  Top Layer w0.3: R304.2 131.164,43.017 131.835,43.688 Q302.C 140.867,43.688 142.139,42.415 142.139,40.099 143.437,38.801 C302.1 143.937,38.501 144.76,38.501 J4.9
PA0: C210.1 J101.11 R219.2 R220.1 | length 96.4
  Top Layer w0.3: J101.11 35.668,23.095 34.925,22.352 34.925,10.795 37.592,8.128 81.82,8.128 82.542,8.85 97.46,8.85 R220.1 107.086,18.476 C210.1 109.42,18.476 109.953,17.943 R219.2
PA5: J3.7 J101.1 | length 77.9
  Top Layer w0.2: J101.1 42.967,16.745 64.676,38.454 78.828,38.454 93.054,52.68 98.29,52.68 J3.7
PA6: J3.8 J101.4 | length 86.7
  Top Layer w0.2: v1(32.258,14.732) 31.8,15.19 31.8,17.345 32.47,18.015 J101.4
  PWR w0.2: v1(32.258,14.732) 43.815,14.732 75.283,46.2 91.031,46.2 95.011,50.18 98.29,50.18 J3.8
PA7: J3.9 J101.2 | length 83.9
  Top Layer w0.2: J101.2 33.147,16.548 v1(33.147,13.843)
  PWR w0.2: v1(33.147,13.843) 43.942,13.843 75.692,45.593 93.007,45.593 95.094,47.68 98.29,47.68 J3.9
PA8: J103.3 R305.1 | length 67.2
  Top Layer w0.3: J103.3 61.818,31.985 61.642,32.161 61.642,33.662 62.516,34.536 64.495,34.536 65.434,35.475 117.34,35.475 119.196,33.619 R305.1
PB1: C204.1 J102.4 R207.1 R208.2 | length 110.3
  Top Layer w0.3: J102.4 43.227,10.262 43.227,11.35 47.625,15.748 55.118,15.748 59.817,20.447 v1(59.817,24.003)
  Bottom Layer w0.3: v1(59.817,24.003) 109.573,24.003 110.046,24.476 135.805,24.476 C204.1@137.221,23.06 ; C204.1 C204.1@137.221,23.06 ; R208.2 R208.2@139.537,24.538 ; R207.1 140.172,23.903 R208.2@139.537,24.538 ; C204.1@137.221,23.06 137.521,23.36 138.259,23.36 139.012,24.113 139.112,24.113 R208.2@139.537,24.538
PB2: C205.1 J102.6 R209.2 R210.1 | length 117.1
  Top Layer w0.3: J102.6 44.285,10.53 47.336,13.581 92.321,13.581 107.188,28.448 119.123,28.448 119.449,28.774 121.213,28.774 125.73,24.257 127.892,24.257 128.533,23.616 128.533,19.757 R209.2@125.068,16.292 ; R209.2 R209.2@125.068,16.292 ; C205.1 134.173,15.306 134.222,15.257 134.222,15.157 R210.1@134.266,15.113 ; R210.1 134.647,14.732 R210.1@134.266,15.113 ; R209.2@125.068,16.292 126.583,16.292 127.762,15.113 R210.1@134.266,15.113
PC1: C203.1 J101.17 R205.1 R206.2 | length 107.2
  Top Layer w0.3: J101.17 37.059,26.915 39.996,26.915 v1(40.005,26.924)
  Bottom Layer w0.3: v1(40.005,26.924) 43.679,23.25 131.223,23.25 132.108,22.365 132.125,22.365 132.611,21.879 132.816,21.879 133.64,21.055 R206.2 135.516,20.955 137.221,19.25 C203.1 137.221,18.85 138.545,17.526 R205.1
PC2: C202.1 J101.15 R203.1 R204.2 | length 111.8
  Top Layer w0.3: J101.15 37.158,25.743 39.713,25.743 v1(39.751,25.781)
  Bottom Layer w0.3: v1(39.751,25.781) 39.751,24.765 44.612,19.904 128.138,19.904 134.231,13.811 134.231,13.225 134.656,12.8 R204.2 135.081,13.125 135.081,13.469 C202.1@137.16,15.548 ; C202.1 C202.1@137.16,15.548 ; R203.1 138.992,13.716 C202.1@137.16,15.548
PC3: C201.1 J101.13 R201.1 R202.2 | length 143.3
  Top Layer w0.3: v1(35.306,24.384) 35.315,24.375 37.04,24.375 J101.13
  Bottom Layer w0.3: v1(35.306,24.384) 35.28,24.358 31.533,24.358 30.861,23.686 30.861,7.874 35.814,2.921 61.849,2.921 63.627,4.699 63.627,7.239 66.828,10.44 135.744,10.44 C201.1@137.094,9.09 ; C201.1 C201.1@137.094,9.09 ; R202.2 140.299,6.532 R201.1 138.164,10.16 C201.1@137.094,9.09
PC6: C305.1 J103.11 R309.1 R310.2 | length 94.6
  Top Layer w0.3: J103.11 63.43,26.905 64.853,28.328 64.853,30.723 65.85,31.721 65.85,33.77 66.055,33.975 116.719,33.975 125.548,25.146 131.826,25.146 132.425,24.547 R310.2 134.212,24.547 135.192,25.527 135.768,25.527 136.878,26.637 136.878,31.336 C305.1 136.979,31.435 139.331,29.083 R309.1
PC7: J103.9 R303.1 | length 79.9
  Top Layer w0.3: J103.9 62.804,28.321 61.214,28.321 60.833,28.702 60.833,33.56 63.341,36.068 98.475,36.068 99.11,36.703 129.068,36.703 R303.1
PD8: J3.10 J103.23 | length 53.1
  PWR w0.3: v1(62.992,19.304) 63.588,19.9 83.781,19.9 101.315,37.434 101.315,42.155 J3.10
PD9: J3.11 J103.21 | length 48.8
  PWR w0.3: v1(62.992,20.574) 82.981,20.574 100.816,38.409 100.816,39.767 99.528,41.055 J3.11
PD10: J3.12 J103.19 | length 43.6
  PWR w0.3: v1(62.992,21.844) 82.43,21.844 J3.12
PD15: C211.1 J103.13 R221.1 R222.2 | length 85.4
  Top Layer w0.3: v1(61.087,25.527) 61.141,25.527 61.249,25.635 J103.13
  Bottom Layer w0.3: v1(61.087,25.527) 64.069,28.509 C211.1 137.36,28.509 138.787,29.936 R222.2 140.054,29.936 140.479,29.511 140.479,29.384 141.823,28.04 R221.1@141.823,27.94
PE7: C206.1 J102.8 R211.2 R212.1 | length 100.7
  Top Layer w0.3: J102.8 45.734,10.229 45.734,11.128 47.298,12.692 92.448,12.692 107.181,27.425 117.684,27.425 118.185,26.924 121.089,26.924 122.4,25.613 122.4,22.362 123.233,21.529 C206.1 ; R211.2 122.555,16.002 122.555,17.78 124.333,19.558 C206.1 ; R212.1 127.287,21.267 124.595,21.267 C206.1
PE8: C207.1 J102.10 R213.2 R214.1 | length 90.8
  Top Layer w0.3: J102.10 46.825,11.265 47.752,12.192 92.964,12.192 107.697,26.925 117.477,26.925 118.403,25.999 R214.1 120.269,22.867 119.7,22.298 C207.1 119.888,21.91 R213.2
PE9: C208.1 J102.12 R215.2 R216.1 | length 85.4
  Top Layer w0.3: J102.12 48.095,10.53 49.122,11.557 71.247,11.557 71.882,10.922 93.726,10.922 109.229,26.425 116.332,26.425 117.257,25.5 R216.1 117.257,21.946 C208.1 117.221,21.778 R215.2
PE10: C209.1 J102.14 R217.2 R218.1 | length 76.6
  Top Layer w0.3: J102.14 49.585,9.83 49.585,8.962 49.784,8.763 81.026,8.763 81.915,9.652 96.007,9.652 109.517,23.162 C209.1 ; C209.1@109.601,23.078 R218.1 ; R218.1@111.973,23.246 R218.1 ; R217.2 114.427,20.892 112.241,23.078 R218.1
S1: J1.7 R201.2 | length 5.9
  Bottom Layer w0.3: R201.2 142.149,10.26 145.217,13.328 J1.7
S2: J1.8 R203.2 | length 5.7
  Bottom Layer w0.3: R203.2 144.613,13.716 J1.8
S3: J1.9 R205.2 | length 5.2
  Bottom Layer w0.3: R205.2 145.565,17.526 146.367,18.328 J1.9
S4: J1.10 R207.2 | length 4.9
  Bottom Layer w0.3: R207.2 142.403,20.828 J1.10
S5: J2.1 R209.1 | length 6.3
  Top Layer w0.3: R209.1 125.062,14.348 J2.1
S6: J2.2 R211.1 | length 5.9
  Top Layer w0.3: R211.1 122.428,8.284 J2.2
S7: J2.3 R213.1 | length 7.1
  Top Layer w0.3: R213.1 120.062,15.03 J2.3
S8: J2.4 R215.1 | length 7.4
  Top Layer w0.3: R215.1 117.221,8.917 117.562,8.576 J2.4
S9: J2.5 R217.1 | length 7.8
  Top Layer w0.3: R217.1@114.527,15.712 114.527,9.111 115.062,8.576 J2.5
S10: J2.6 R219.1 | length 8.3
  Top Layer w0.3: R219.1 111.86,16.093 112.285,15.668 112.285,8.427 J2.6
S11: J1.4 R221.2 | length 13.6
  Bottom Layer w0.3: R221.2@143.673,27.94 143.673,27.84 144.098,27.415 149.459,27.415 150.513,26.361 150.513,22.116 J1.4
VDDA: J3.1 J4.12 J101.6 J101.8 J102.1 J104.2 | length 178
  Top Layer w0.5: J101.6 J101.8 29.122,20.555 28.829,20.848 ; J102.1 32.531,5.95 28.829,9.652 28.829,20.848 ; v1(41.783,43.434) 41.745,43.396 J104.2 41.745,41.57 41.625,41.45 34.846,41.45 28.829,35.433 28.829,20.848
  PWR w0.5: v1(41.783,43.434) 43.942,45.593 73.258,45.593 81.615,53.95 94.52,53.95 J3.1 98.416,52.83 137.931,52.83 J4.12
pads on no net: J1.MH1 J2.MH1 J3.MH1 J4.4 J4.5 J4.MH1 J101.3 J101.5 J101.12 J101.14 J101.16 J101.18 J101.19 J101.20 J101.21 J101.22 J101.23 J101.24 J101.25 J101.26 J101.27 J101.28 J102.2 J102.3 J102.5 J102.7 J102.9 J102.11 J102.13 J102.15 J102.16 J102.17 J102.18 J102.19 J102.20 J102.21 J102.22 J102.23 J102.24 J102.25 J103.1 J103.2 J103.4 J103.6 J103.8 J103.10 J103.12 J103.14 J103.15 J103.16 J103.17 J103.18 J103.20 J103.22 J103.25 J103.26 J103.27 J103.28 J104.1 J104.3 J104.5 J104.7 J104.9 J104.12 J104.14 J104.15 J104.16 J104.17 J104.18 J104.19 J104.20 J104.21 J104.22 J104.23 J104.25 J104.27
copper on no net:
  other v1: 131.826,23.495 142.24,30.861 141.732,37.592

## Polygon pours and split planes (outlines as drawn)
AGND on Top Layer "AGND_L01_P004" (solid, pour order 4): 0,5.013 0,50.013 cw(c5,50.013) 5,55.013 150,55.013 cw(c150,50.013) 155,50.013 155,5.013 cw(c150,5.013) 150,0.013 5,0.013 cw(c5,5.013)
AGND on Top Layer "AGND_L01_P003" (solid, pour order 3): 100.337,29.501 100.337,2.069 138.437,2.069 138.818,2.45 138.818,18.579 135.77,21.627 132.595,21.627 127.134,27.088 123.832,29.12 122.435,29.501 120.784,30.009 100.718,30.009 100.337,29.628
AGND on GND "AGND_L02_P002" (solid, pour order 2): 0,5 0,50 cw(c5,50) 5,55 150,55 cw(c150,50) 155,50 155,5 cw(c150,5) 150,0 5,0 cw(c5,5)
AGND on GND "AGND_L02_P001" (solid, pour order 1): 99.949,29.337 100.203,29.083 100.203,1.143 138.557,1.143 139.065,1.651 137.16,3.556 137.16,19.177 133.604,22.733 125.222,22.733 125.222,24.892 120.142,29.972 100.457,29.972 99.949,29.464 100.076,29.337
AGND on Bottom Layer "AGND_L04_P005" (solid, pour order 5): 106.172,26.543 106.553,26.162 106.553,1.27 140.462,1.27 150.241,11.049 154.051,11.049 154.432,11.43 154.432,27.813 146.304,27.813 141.224,32.893 108.839,32.893 105.791,29.845 106.172,29.464 106.172,26.416

## Silkscreen, mask and mechanical layers (free items; w line width, h text height)
Top Overlay:
  drawing of 49 lines, arcs and shapes, not listed
  text "Shield Area" at 26.418,45.466 h2
  text "Bernat Costa Cesari 2023" at 1.524,41.526 h3 r270
  text "ETR_Rear_ECU" at 4.187,41.526 h3 r270
Mechanical 1:
  the board outline again, w0.1

## Text inside footprints (layer, text, board x,y; h text height)
J101: Top Overlay "28" at 33,34.02 h2 r90; Top Overlay "27" at 38,34.02 h2 r90; Top Overlay "1" at 38,15.68 h2 r90; Top Overlay "2" at 33,15.28 h2 r90
J102: Top Overlay "28" at 59.02,10 h2; Top Overlay "27" at 59.02,5 h2; Top Overlay "1" at 40.68,5 h2; Top Overlay "2" at 40.28,10 h2
J103: Top Overlay "28" at 67,15.98 h2 r270; Top Overlay "27" at 62,15.98 h2 r270; Top Overlay "1" at 62,34.32 h2 r270; Top Overlay "2" at 67,34.72 h2 r270
J104: Top Overlay "28" at 59.02,42 h2; Top Overlay "27" at 59.02,37 h2; Top Overlay "1" at 40.68,37 h2; Top Overlay "2" at 40.28,42 h2